# Altium PCB STM32-ROMI_Rev_A1.PcbDoc
Units mil, origin at the board's own origin, x right, y up, seen from the top; angles counter-clockwise.
Board outline 3628 x 4962.31 mil, 2 copper layers (Top Layer, Bottom Layer); 13 components, 0 nets, 97 pads, 0 vias.
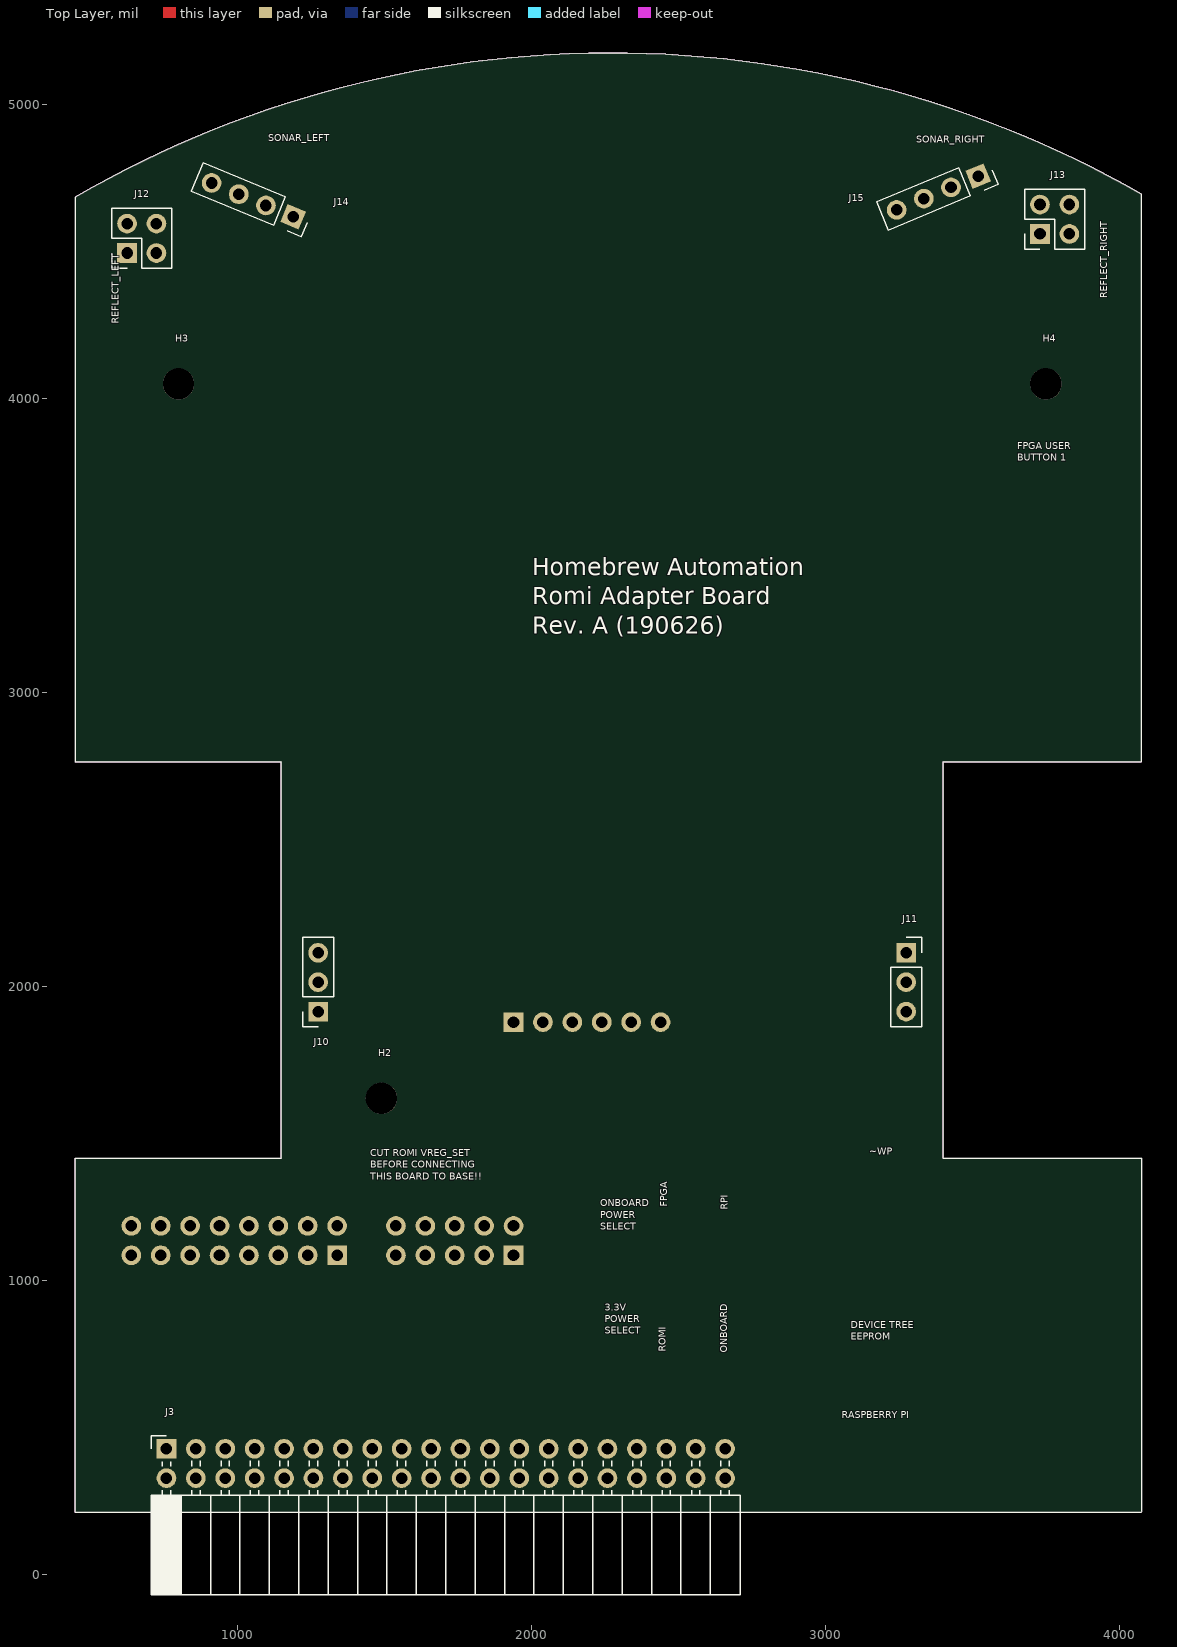
[diagram p0: Top Layer view]
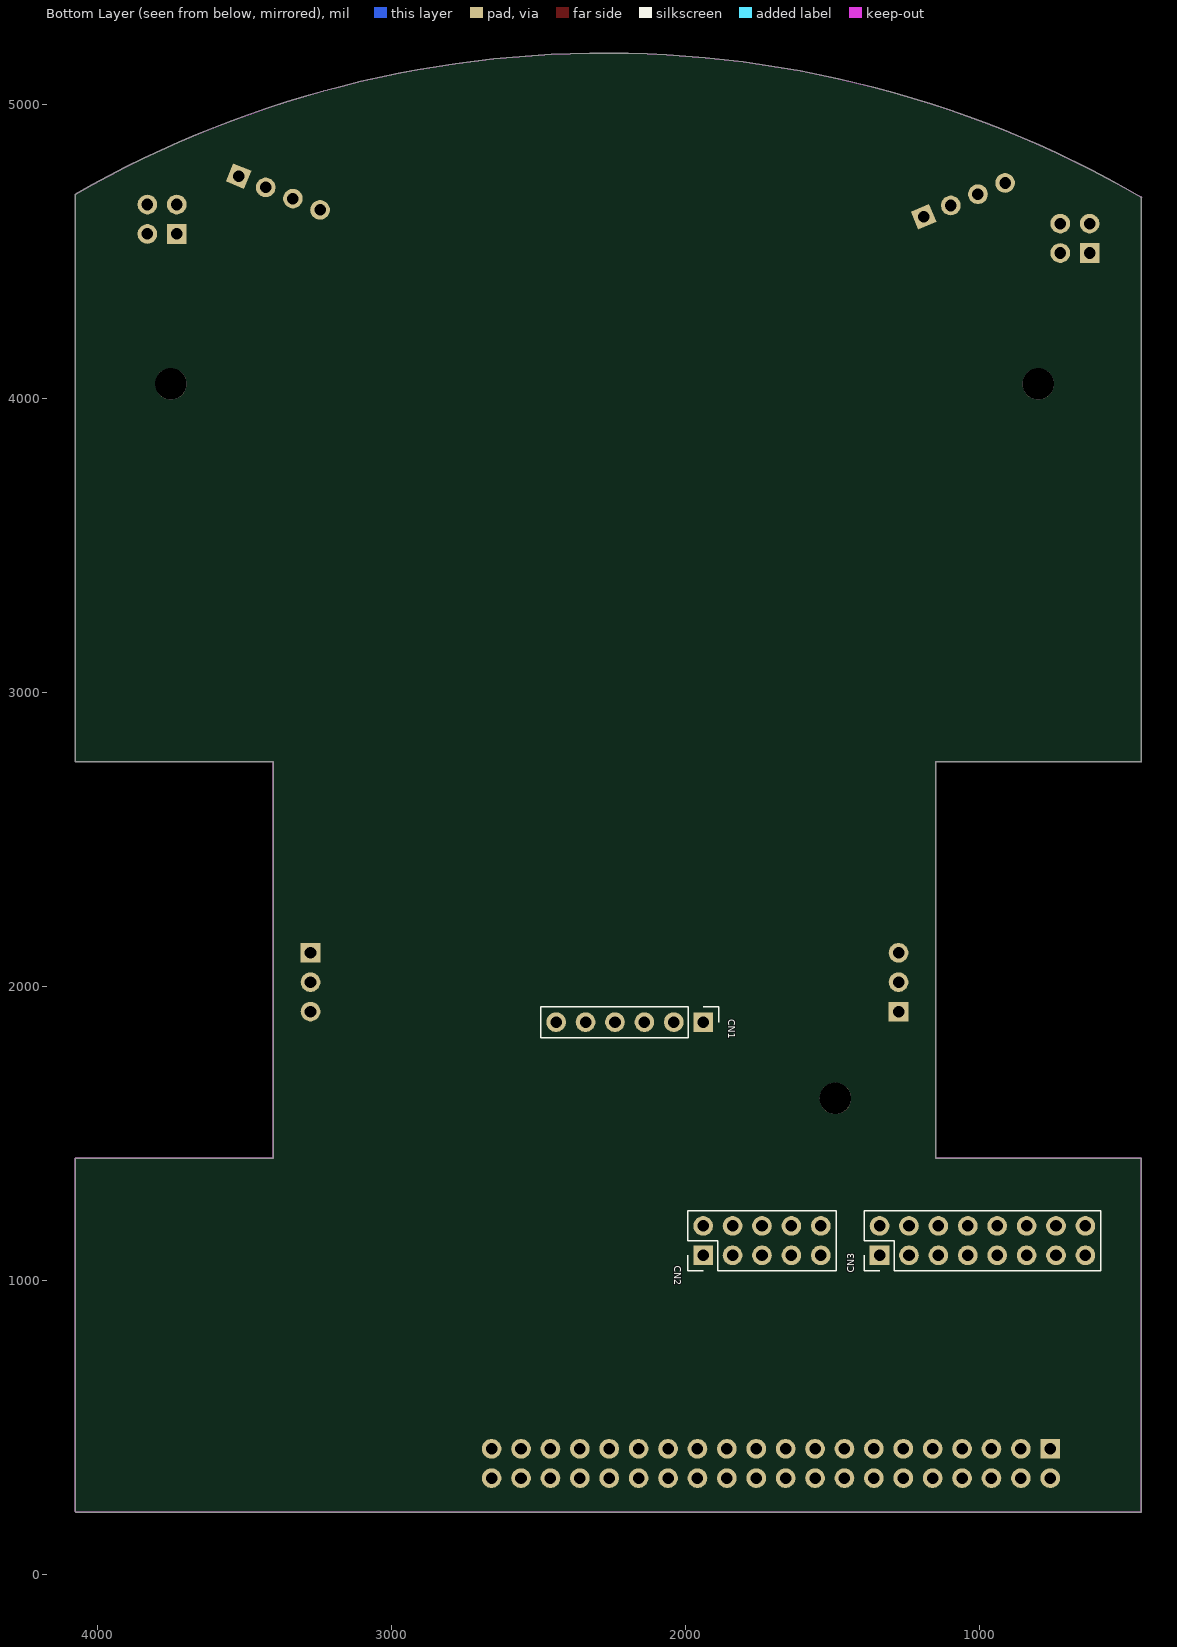
[diagram p1: Bottom Layer view, seen from below]

## Layer stack, top to bottom
Top Solder: solder mask 0.4, Solder Resist, Dk 3.5
Top Layer: signal copper 1.4
Dielectric 1: dielectric 12.6, FR-4, Dk 4.8
Bottom Layer: signal copper 1.4
Bottom Solder: solder mask 0.4, Solder Resist, Dk 3.5

## Board outline
449,1416 1149,1416 1149,2764 450,2764 cw(c450,2765) 449,2765 449,4684.41 448,4683.95 cw(c2271.16,1547.31) 4075.04,4695.07 4075,4695 4075,2764.54 4075,2764 3401,2764 3401,1416 4076,1416 4076,1414 4076,215 4073.98,212.99 449,212.99

## Design rules (kind name [scope] priority, off if disabled: settings)
Clearance [All] p1: gap=10 ignorepadtopadclearanceinfootprint=FALSE except(0: Arc-Hole Track-Hole SMDPad-Hole THPad-Hole Via-Hole Fill-Hole Poly-Hole Region-Hole Text-Hole)
PolygonConnect [All] p1: connectstyle=Relief reliefconductorwidth=10 reliefentries=4 polygonreliefangle="90 Angle" airgapwidth=10
RoutingVias [All] p1: holewidth=28 width=50 viastyle="Through Hole" minholewidth=28 minwidth=50 maxholewidth=28 maxwidth=50
SolderMaskExpansion [All] p1: expansion=4 istentingtop=FALSE
Width [All] p1: maxlimit=10 minlimit=10 preferedwidth=10
30 further rules are at their usual default settings.

## Classes and differential pairs
component class STM32-ROMI_Rev_A_3_OLED_Sensor: C24
component class STM32-ROMI_Rev_A_2_Connectors: CN1 CN2 CN3
component class STM32-ROMI_Rev_A_2_3V_5V: TP6 TP7 TP8 TP9 U14

## Components (designator, comment, footprint, x,y, rotation, side; value= is the part's Value field where it differs from the comment)
CN1 "PinHeader_1x06_P2.54mm_Vertical" PinHeader_1x06_P2.54mm_Vertical 1939.5,1879 r90 bottom locked
CN2 "PinHeader_2x05_P2.54mm_Vertical" PinHeader_2x05_P2.54mm_Vertical 1939.5,1086.1 r270 bottom locked
CN3 "PinHeader_2x08_P2.54mm_Vertical" PinHeader_2x08_P2.54mm_Vertical 1339.5,1086.1 r270 bottom locked
H2 "MountingHole" MountingHole_2.7mm_M2.5 1490,1620 r0 top locked
H3 "MountingHole" MountingHole_2.7mm_M2.5 800,4050 r0 top locked
H4 "MountingHole" MountingHole_2.7mm_M2.5 3750,4050 r0 top locked
J3 "Raspberry_Pi_2_3" PinSocket_2x20_P2.54mm_Horizontal 759,428 r90 top locked
J10 "PinSocket_1x03_P2.54mm_Vertical" PinSocket_1x03_P2.54mm_Vertical 1275,1915 r180 top locked
J11 "PinSocket_1x03_P2.54mm_Vertical" PinSocket_1x03_P2.54mm_Vertical 3275,2115 r0 top locked
J12 "PinSocket_2x02_P2.54mm_Vertical" PinSocket_2x02_P2.54mm_Vertical 625,4495 r180 top locked
J13 "PinSocket_2x02_P2.54mm_Vertical" PinSocket_2x02_P2.54mm_Vertical 3730,4560 r180 top locked
J14 "PinSocket_1x04_P2.54mm_Vertical" PinSocket_1x04_P2.54mm_Vertical 1189.78,4618.46 r247.5 top locked
J15 "PinSocket_1x04_P2.54mm_Vertical" PinSocket_1x04_P2.54mm_Vertical 3519.78,4756.54 r292.5 top locked

## Footprints (in the part's own frame and the unit in brackets; to place one, negate y for a bottom-side part, rotate by r counter-clockwise, add the part's x,y. Pads: shape width x height; smd on the part's side, far side on the other; paste and mask are expansions set on the pad)
MountingHole_2.7mm_M2.5 [mm]
  round 2.7 hole 2.7 paste-2.7 mask+0.051: 1(0,0)
PinHeader_1x06_P2.54mm_Vertical [mm] "header for the romi board"
  rect 1.7x1.7 hole 1 paste-1.7 mask+0.051: 1(0,0)
  rrect100% 1.7x1.7 hole 1 paste-1.7 mask+0.051: 2(0,2.54) 3(0,5.08) 4(0,7.62) 5(0,10.16) 6(0,12.7)
  silkscreen extent -1.33,-1.33 1.33,14.03
PinHeader_2x05_P2.54mm_Vertical [mm] "10 pin romi header"
  rect 1.7x1.7 hole 1 paste-1.7 mask+0.051: 1(0,0)
  rrect100% 1.7x1.7 hole 1 paste-1.7 mask+0.051: 2(-2.54,0) 3(0,2.54) 4(-2.54,2.54) 5(0,5.08) 6(-2.54,5.08) 7(0,7.62) 8(-2.54,7.62) 9(0,10.16) 10(-2.54,10.16)
  silkscreen extent -3.87,-1.33 1.33,11.49
PinHeader_2x08_P2.54mm_Vertical [mm]
  rect 1.7x1.7 hole 1 paste-1.7 mask+0.051: 1(0,0)
  rrect100% 1.7x1.7 hole 1 paste-1.7 mask+0.051: 2(-2.54,0) 3(0,2.54) 4(-2.54,2.54) 5(0,5.08) 6(-2.54,5.08) 7(0,7.62) 8(-2.54,7.62) 9(0,10.16) 10(-2.54,10.16) 11(0,12.7) 12(-2.54,12.7) 13(0,15.24) 14(-2.54,15.24) 15(0,17.78) 16(-2.54,17.78)
  silkscreen extent -3.87,-1.33 1.33,19.11
PinSocket_1x03_P2.54mm_Vertical [mm]
  rect 1.7x1.7 hole 1 paste-1.7 mask+0.051: 1(0,0)
  rrect100% 1.7x1.7 hole 1 paste-1.7 mask+0.051: 2(0,-2.54) 3(0,-5.08)
  silkscreen extent -1.33,-6.41 1.33,1.33
PinSocket_1x04_P2.54mm_Vertical [mm]
  rect 1.7x1.7 hole 1 paste-1.7 mask+0.051: 1(0,0)
  rrect100% 1.7x1.7 hole 1 paste-1.7 mask+0.051: 2(0,-2.54) 3(0,-5.08) 4(0,-7.62)
  silkscreen extent -1.33,-8.95 1.33,1.33
PinSocket_2x02_P2.54mm_Vertical [mm]
  rect 1.7x1.7 hole 1 paste-1.7 mask+0.051: 1(0,0)
  rrect100% 1.7x1.7 hole 1 paste-1.7 mask+0.051: 2(-2.54,0) 3(0,-2.54) 4(-2.54,-2.54)
  silkscreen extent -3.87,-3.87 1.33,1.33
PinSocket_2x20_P2.54mm_Horizontal [mm]
  rect 1.7x1.7 hole 1 paste-1.7 mask+0.051: 1(0,0)
  rrect100% 1.7x1.7 hole 1 paste-1.7 mask+0.051: 2(-2.54,0) 3(0,-2.54) 4(-2.54,-2.54) 5(0,-5.08) 6(-2.54,-5.08) 7(0,-7.62) 8(-2.54,-7.62) 9(0,-10.16) 10(-2.54,-10.16) 11(0,-12.7) 12(-2.54,-12.7) 13(0,-15.24) 14(-2.54,-15.24) 15(0,-17.78) 16(-2.54,-17.78) 17(0,-20.32) 18(-2.54,-20.32) 19(0,-22.86) 20(-2.54,-22.86) 21(0,-25.4) 22(-2.54,-25.4) 23(0,-27.94) 24(-2.54,-27.94) 25(0,-30.48) 26(-2.54,-30.48) 27(0,-33.02) 28(-2.54,-33.02) 29(0,-35.56) 30(-2.54,-35.56) 31(0,-38.1) 32(-2.54,-38.1) 33(0,-40.64) 34(-2.54,-40.64) 35(0,-43.18) 36(-2.54,-43.18) 37(0,-45.72) 38(-2.54,-45.72) 39(0,-48.26) 40(-2.54,-48.26)
  silkscreen extent -12.63,-49.59 1.11,1.33

## Part data
CN1: library part "Romi_Header 6", "Header, 6-Pin", Color=Black, Manufacturer="Sullins Connector Solutions", Manufacturer Part Number=PRPC006SAAN-RC, Supplier Part Number 1=S1011EC-06-ND, Category="Connectors, Interconnects", ComponentLink1Description=http://media.digikey.com/PDF/Data%20Sheets/Sullins%20PDFs/xRxCzzzSxxN-RC_ST_11635-B.pdf, ComponentLink1URL=http://media.digikey.com/PDF/Data%20Sheets/Sullins%20PDFs/xRxCzzzSxxN-RC_ST_11635-B.pdf, Connector Type="Header, Unshrouded, Breakaway", Contact Finish=Gold, Contact Finish Thickness=Flash, Contact Mating Length="0.230\" (5.84mm)", Contact Type="Male Pin", Fastening Type=-, Features=-, Mounting Type="Through Hole", Number of Positions=6, Number of Positions Loaded=All, Number of Rows=1, Packaging=Bulk, Pitch="0.100\" (2.54mm)", Pricing 1="1=0.23, 10=0.205, 100=0.1689, 500=0.13352, 1000=0.11461, 5000=0.10456, 10000=0.10054 (USD)", RoHS="RoHS Compliant", Row Spacing=-, Stock 1=1723, Supplier 1=Digi-Key, Termination=Solder
CN2: library part "Romi-Header 5X2", "Header, 5-Pin, Dual row", LatestRevisionDate=17-Jul-2002, LatestRevisionNote="Re-released for DXP Platform.", Publisher="Altium Limited"
CN3: library part "Romi_Header 8X2", "Header, 8-Pin, Dual row", LatestRevisionDate=17-Jul-2002, LatestRevisionNote="Re-released for DXP Platform.", Publisher="Altium Limited"
H2 H3 H4: library part MountingHole_2.7mm_M2.5, "Mounting Hole 2.7mm, no annular, M2.5"
J3: library part PinSocket_2x20_P2.54mm_Horizontal, "Through hole angled socket strip, 2x20, 2.54mm pitch, 8.51mm socket length, double cols (from Kicad 4.0.7), script generated"
J10 J11: "Through hole straight socket strip, 1x03, 2.54mm pitch, single row (from Kicad 4.0.7), script generated"
J12 J13: "Through hole straight socket strip, 2x02, 2.54mm pitch, double cols (from Kicad 4.0.7), script generated"
J14 J15: "Through hole straight socket strip, 1x04, 2.54mm pitch, single row (from Kicad 4.0.7), script generated"

## Nets (pads, with @x,y where several pads share a name; then routed paths per layer and width w, separated by ;. In a path a pad name is that pad's centre, name@x,y a point inside that pad or via, vN(x,y) a via of type N, cw(c..) or ccw(c..) an arc to the next point about the centre after c; other vN are vias at no path point)
pads on no net: CN1.1 CN1.2 CN1.3 CN1.4 CN1.5 CN1.6 CN2.1 CN2.2 CN2.3 CN2.4 CN2.5 CN2.6 CN2.7 CN2.8 CN2.9 CN2.10 CN3.1 CN3.2 CN3.3 CN3.4 CN3.5 CN3.6 CN3.7 CN3.8 CN3.9 CN3.10 CN3.11 CN3.12 CN3.13 CN3.14 CN3.15 CN3.16 H2.1 H3.1 H4.1 J3.1 J3.2 J3.3 J3.4 J3.5 J3.6 J3.7 J3.8 J3.9 J3.10 J3.11 J3.12 J3.13 J3.14 J3.15 J3.16 J3.17 J3.18 J3.19 J3.20 J3.21 J3.22 J3.23 J3.24 J3.25 J3.26 J3.27 J3.28 J3.29 J3.30 J3.31 J3.32 J3.33 J3.34 J3.35 J3.36 J3.37 J3.38 J3.39 J3.40 J10.1 J10.2 J10.3 J11.1 J11.2 J11.3 J12.1 J12.2 J12.3 J12.4 J13.1 J13.2 J13.3 J13.4 J14.1 J14.2 J14.3 J14.4 J15.1 J15.2 J15.3 J15.4
copper on no net: | length 123
  Top Layer w10: 1925,1893.5 1939.5,1879 ; 2025,1893.5 2039.5,1879 ; 2125,1893.5 2139.5,1879 ; 2225,1893.5 2239.5,1879 ; 2325,1893.5 2339.5,1879 ; 2425,1893.5 2439.5,1879

## Keep-outs
Keep-Out Layer:
  lines w2: 4325,1417.01 cw(c4325,1415) 4327.01,1415 ; 448,4683.95 cw(c2271.16,1547.31) 4075.04,4695.07 4075,4695 4075,2764.54 4075,2764 3401,2764 3401,1416 4076,1416 4076,1414 4076,215 4073.98,212.99 449,212.99 449,1416 1149,1416 1149,2764 450,2764 cw(c450,2765) 449,2765 449,4684.41 448,4683.95

## Silkscreen, mask and mechanical layers (free items; w line width, h text height)
Top Overlay:
  lines w2: 251.4,215 ccw(c252.4,215) 252.4,214 ; 251.4,1415 cw(c252.4,1415) 252.4,1416 ; 448,4683.95 cw(c2271.16,1547.31) 4075.04,4695.07 ; 449,4684.41 449,2765 ccw(c450,2765) 450,2764 1149,2764 1149,1416 449,1416 449,212.99 4073.98,212.99 4076,215 4076,1414 4076,1416 3650,1416 3401,1416 3401,2764 4075,2764 ; 4075,2764.54 4075,4695 ; 4325,1416 cw(c4325,1415) 4326,1415
  text "SONAR_LEFT" at 1105.89,4866.93 h39.37
  text "SONAR_RIGHT" at 3309.43,4861.93 h39.37
  text "REFLECT_RIGHT" at 3968.07,4341.24 h39.37 r90
  text "REFLECT_LEFT" at 605,4255 h39.37 r90
  text "FPGA USER / BUTTON 1" at 3653.48,3780.43 h39.37
  text "Homebrew Automation / Romi Adapter Board / Rev. A (190626)" at 2002.4,3179.21 h100
  text "~WP" at 3149.7,1418.95 h39.37
  text "CUT ROMI VREG_SET / BEFORE CONNECTING / THIS BOARD TO BASE!!" at 1452.37,1335.19 h39.37
  text "FPGA" at 2471.19,1252.05 h39.37 r90
  text "RPI" at 2675.9,1241.57 h39.37 r90
  text "ONBOARD / POWER / SELECT" at 2235,1165 h39.37
  text "3.3V / POWER / SELECT" at 2250,810 h39.37
  text "DEVICE TREE / EEPROM" at 3085.83,790.43 h39.37
  text "ROMI" at 2466.19,758.23 h39.37 r90
  text "ONBOARD" at 2675,755 h39.37 r90
  text "RASPBERRY PI" at 3055.37,523.81 h39.37
Mechanical 2:
  drawing of 882 lines, arcs and shapes, not listed

## Text inside footprints (layer, text, board x,y; h text height)
CN1: Mechanical 5 "J9" at 2183,2034 h39.37
CN2: Mechanical 5 "J20" at 1754.75,1121.79 h39.37
CN3: Mechanical 5 "J7" at 998.64,1121.9 h39.37